# Altium PCB pcb.PcbDoc (part 4 of 6)
Units mm, origin at the board's own origin, x right, y up, seen from the top; angles counter-clockwise.
Board outline 163.6 x 137.4 mm, 4 copper layers (Top Layer, GND2, GND3, Bottom Layer), stack 1.586 mm thick; 362 components, 323 nets, 1261 pads, 657 vias.
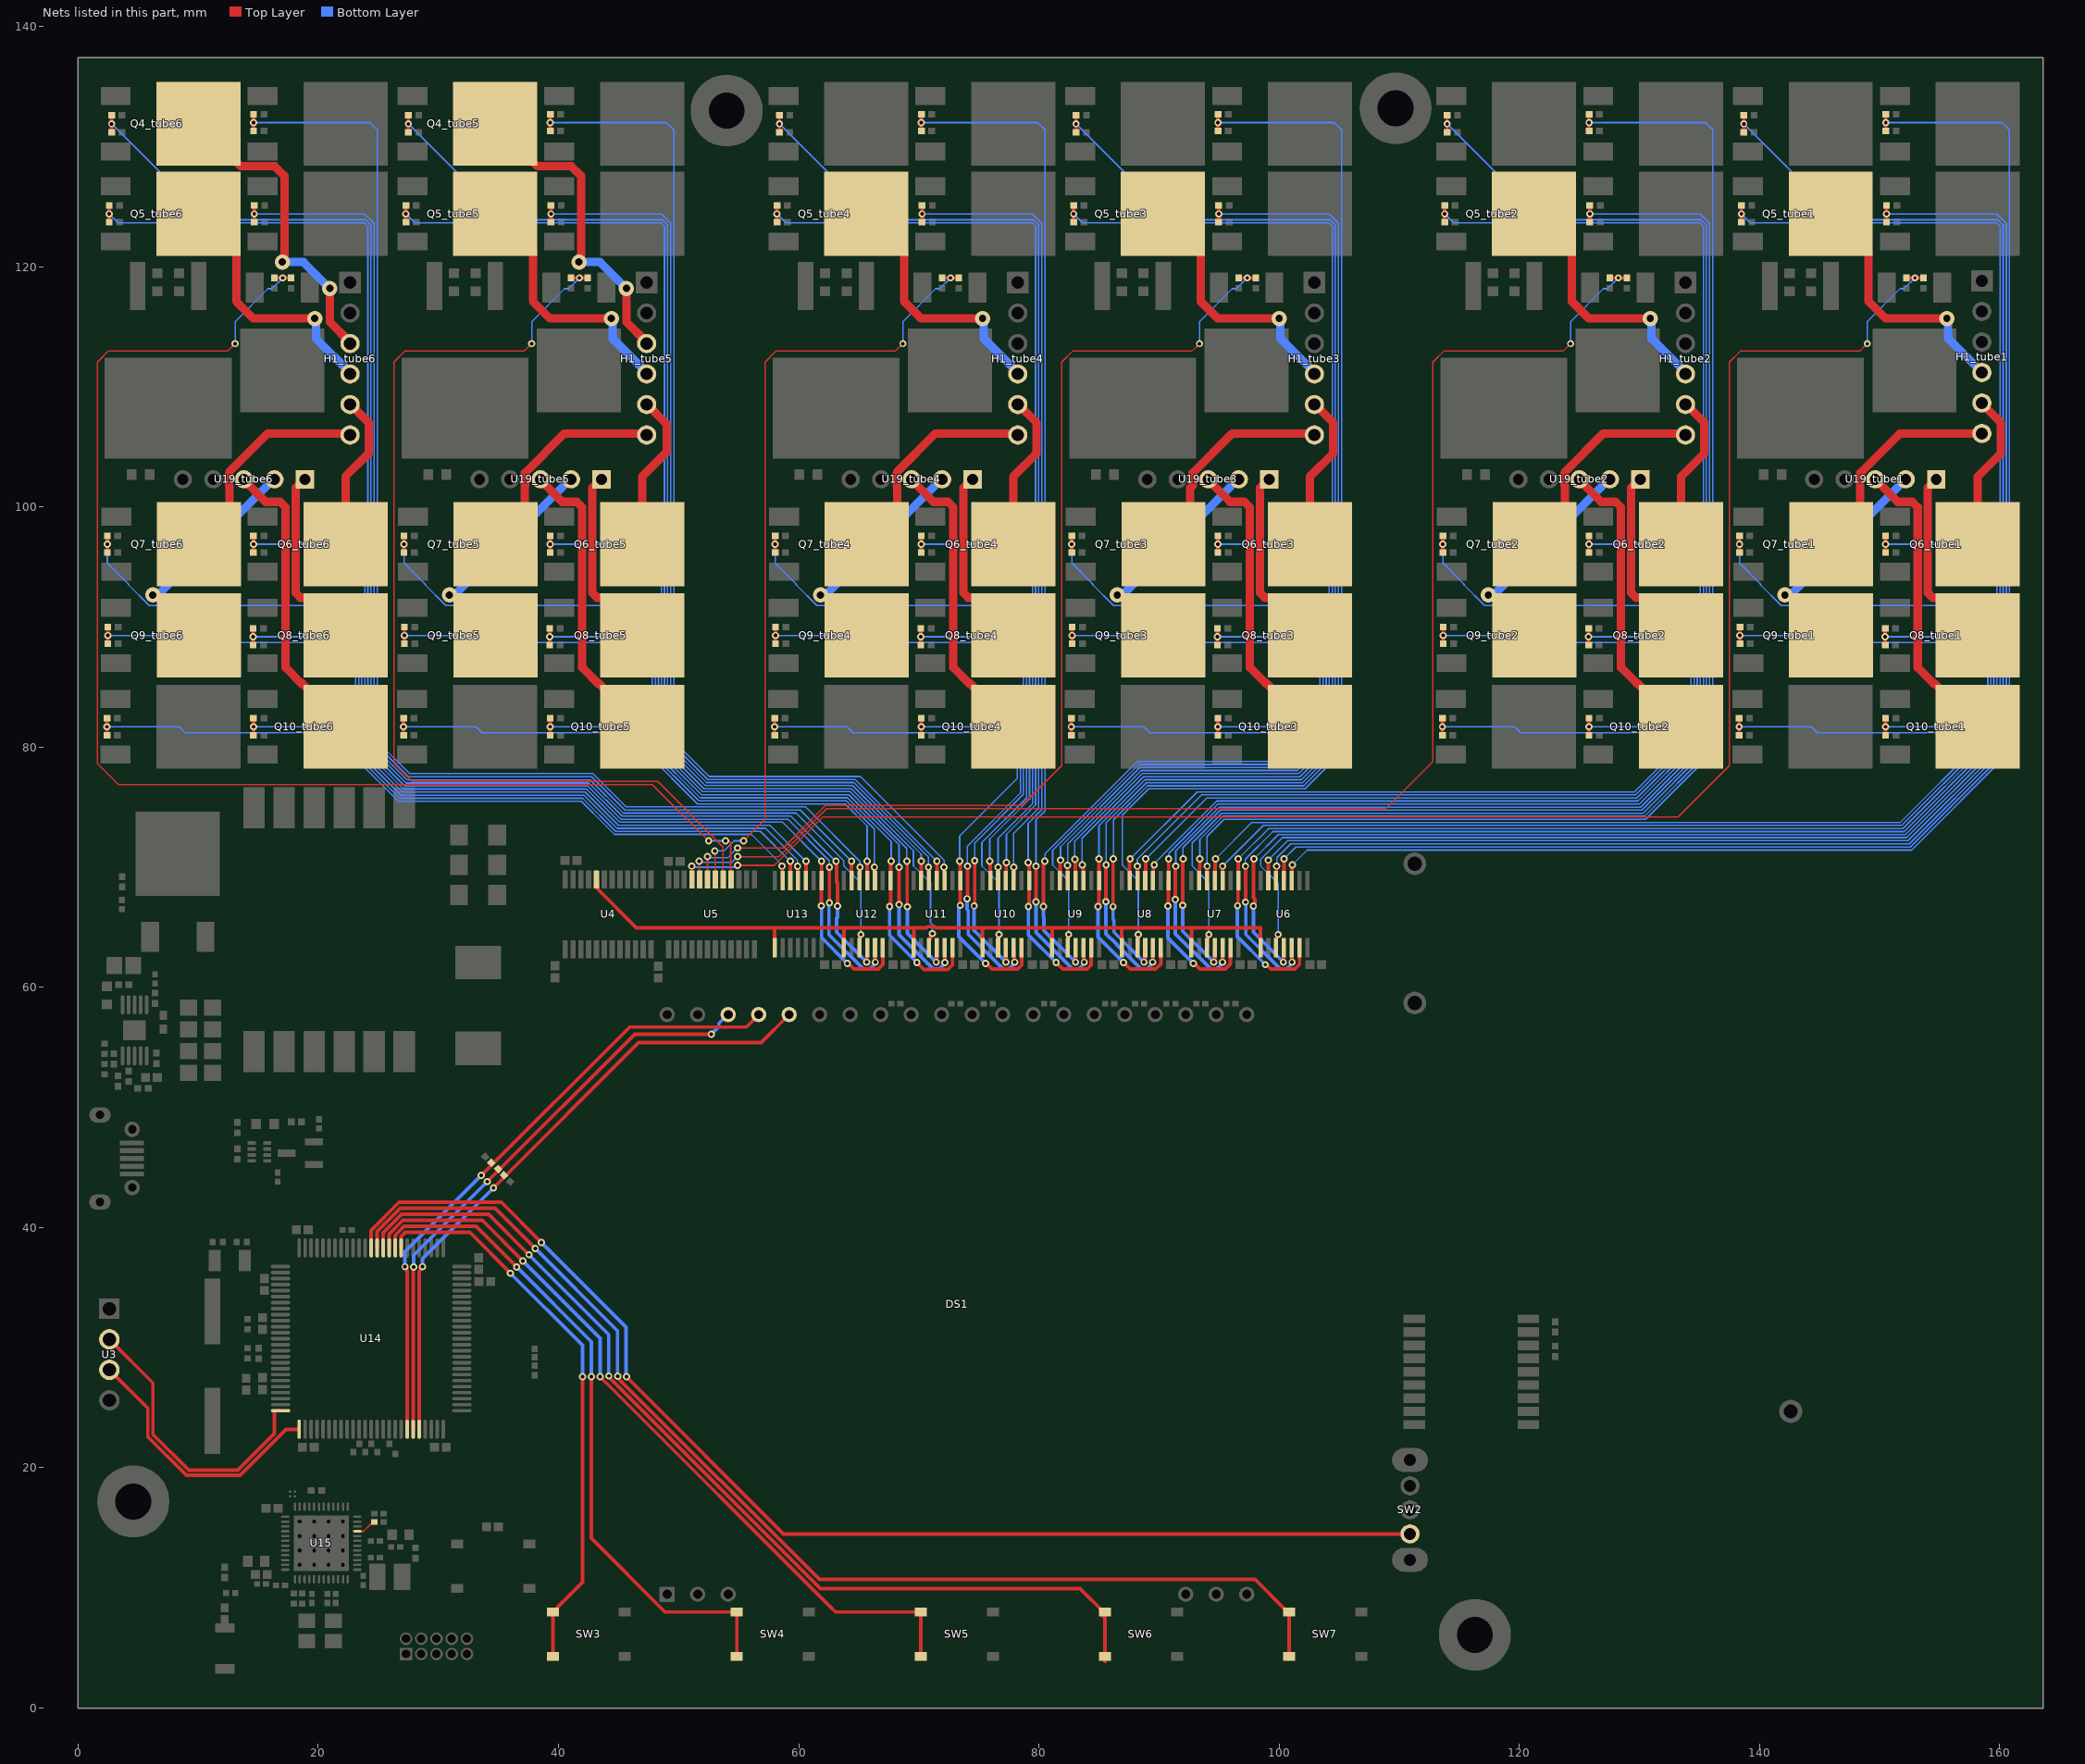
[diagram p5: the nets of this part, all layers, seen from the top]

## Via types
v1: diameter 0.6, hole 0.3, Top Layer to Bottom Layer, 545 vias
v2: diameter 1.27, hole 0.6, Top Layer to Bottom Layer, 97 vias
v3: diameter 1.27, hole 0.711, Top Layer to Bottom Layer, 13 vias
v4: diameter 0.5, hole 0.2, Top Layer to Bottom Layer, 2 vias

## Nets (pads, with @x,y where several pads share a name; then routed paths per layer and width w, separated by ;. In a path a pad name is that pad's centre, name@x,y a point inside that pad or via, vN(x,y) a via of type N, cw(c..) or ccw(c..) an arc to the next point about the centre after c; other vN are vias at no path point) (continued)
CATH_3_tube5: H1_tube5.3 Q4_tube5.4 | length 26.2
  Top Layer w0.7: Q4_tube5.4@34.725,131.9 38.248,128.377 38.618,128.377 38.622,128.373 41.071,128.373 41.885,127.559 41.885,120.988 41.809,120.912 41.809,120.509 v2(41.7,120.4) ; v2(45.657,118.2) 45.657,115.402 H1_tube5.3@47.319,113.74
  Bottom Layer w0.7: v2(41.7,120.4) 43.457,120.4 v2(45.657,118.2)
CATH_3_tube6: H1_tube6.3 Q4_tube6.4 | length 26.2
  Top Layer w0.7: Q4_tube6.4@10.025,131.9 13.548,128.377 13.918,128.377 13.922,128.373 16.371,128.373 17.185,127.559 17.185,120.988 17.109,120.912 17.109,120.509 v2(17,120.4) ; v2(20.957,118.2) 20.957,115.402 H1_tube6.3@22.619,113.74
  Bottom Layer w0.7: v2(17,120.4) 18.757,120.4 v2(20.957,118.2)
CATH_4_tube1: H1_tube1.4 Q5_tube1.4 | length 21.4
  Top Layer w0.7: Q5_tube1.4@145.925,124.4 149.075,121.25 149.075,117.125 150.5,115.7 v2(155.6,115.7)
  Bottom Layer w0.7: v2(155.6,115.7) 155.703,115.597 155.703,114.015 H1_tube1.4@158.519,111.2
CATH_4_tube2: H1_tube2.4 Q5_tube2.4 | length 21.4
  Top Layer w0.7: Q5_tube2.4@121.225,124.4 124.375,121.25 124.375,117.125 125.8,115.7 v2(130.9,115.7)
  Bottom Layer w0.7: v2(130.9,115.7) 131.003,115.597 131.003,114.015 H1_tube2.4@133.819,111.2
CATH_4_tube3: H1_tube3.4 Q5_tube3.4 | length 21.4
  Top Layer w0.7: Q5_tube3.4@90.325,124.4 93.475,121.25 93.475,117.125 94.9,115.7 v2(100,115.7)
  Bottom Layer w0.7: v2(100,115.7) 100.103,115.597 100.103,114.015 H1_tube3.4@102.919,111.2
CATH_4_tube4: H1_tube4.4 Q5_tube4.4 | length 21.4
  Top Layer w0.7: Q5_tube4.4@65.625,124.4 68.775,121.25 68.775,117.125 70.2,115.7 v2(75.3,115.7)
  Bottom Layer w0.7: v2(75.3,115.7) 75.403,115.597 75.403,114.015 H1_tube4.4@78.219,111.2
CATH_4_tube5: H1_tube5.4 Q5_tube5.4 | length 21.4
  Top Layer w0.7: Q5_tube5.4@34.725,124.4 37.875,121.25 37.875,117.125 39.3,115.7 v2(44.4,115.7)
  Bottom Layer w0.7: v2(44.4,115.7) 44.503,115.597 44.503,114.015 H1_tube5.4@47.319,111.2
CATH_4_tube6: H1_tube6.4 Q5_tube6.4 | length 21.4
  Top Layer w0.7: Q5_tube6.4@10.025,124.4 13.175,121.25 13.175,117.125 14.6,115.7 v2(19.7,115.7)
  Bottom Layer w0.7: v2(19.7,115.7) 19.803,115.597 19.803,114.015 H1_tube6.4@22.619,111.2
CATH_5_tube1: H1_tube1.5 Q6_tube1.4 | length 13.2
  Top Layer w0.7: Q6_tube1.4@158.169,96.9 158.169,102.536 160.1,104.467 160.1,107.016 158.519,108.597 H1_tube1.5@158.519,108.66
CATH_5_tube2: H1_tube2.5 Q6_tube2.4 | length 13.2
  Top Layer w0.7: Q6_tube2.4@133.469,96.9 133.469,102.536 135.4,104.467 135.4,107.016 H1_tube2.5@133.819,108.597
CATH_5_tube3: H1_tube3.5 Q6_tube3.4 | length 13.2
  Top Layer w0.7: Q6_tube3.4@102.569,96.9 102.569,102.536 104.5,104.467 104.5,107.016 H1_tube3.5@102.919,108.597
CATH_5_tube4: H1_tube4.5 Q6_tube4.4 | length 13.2
  Top Layer w0.7: Q6_tube4.4@77.869,96.9 77.869,102.536 79.8,104.467 79.8,107.016 H1_tube4.5@78.219,108.597
CATH_5_tube5: H1_tube5.5 Q6_tube5.4 | length 13.2
  Top Layer w0.7: Q6_tube5.4@46.969,96.9 46.969,102.536 49,104.567 49,106.916 H1_tube5.5@47.319,108.597
CATH_5_tube6: H1_tube6.5 Q6_tube6.4 | length 13.2
  Top Layer w0.7: Q6_tube6.4@22.269,96.9 22.269,102.536 24.2,104.467 24.2,107.016 H1_tube6.5@22.619,108.597
CATH_6_tube1: H1_tube1.6 Q7_tube1.4 | length 18.4
  Top Layer w0.7: Q7_tube1.4@145.967,96.9 148.391,99.324 148.391,102.818 151.693,106.12 H1_tube1.6@158.519,106.12
CATH_6_tube2: H1_tube2.6 Q7_tube2.4 | length 18.4
  Top Layer w0.7: Q7_tube2.4@121.267,96.9 123.8,99.433 123.8,101.756 123.764,101.791 123.764,102.818 123.8,102.853 123.8,102.926 126.993,106.12 H1_tube2.6@133.819,106.12
CATH_6_tube3: H1_tube3.6 Q7_tube3.4 | length 18.4
  Top Layer w0.7: Q7_tube3.4@90.367,96.9 92.6,99.133 92.6,101.589 92.802,101.791 92.802,102.829 96.093,106.12 H1_tube3.6@102.919,106.12
CATH_6_tube4: H1_tube4.6 Q7_tube4.4 | length 18.4
  Top Layer w0.7: Q7_tube4.4@65.667,96.9 68.2,99.433 68.2,101.756 68.164,101.791 68.164,102.818 68.2,102.853 68.2,102.926 71.393,106.12 H1_tube4.6@78.219,106.12
CATH_6_tube5: H1_tube5.6 Q7_tube5.4 | length 18.4
  Top Layer w0.7: Q7_tube5.4@34.767,96.9 37.2,99.333 37.2,101.789 37.202,101.791 37.202,102.829 40.493,106.12 H1_tube5.6@47.319,106.12
CATH_6_tube6: H1_tube6.6 Q7_tube6.4 | length 18.4
  Top Layer w0.7: Q7_tube6.4@10.067,96.9 12.6,99.433 12.6,101.756 12.564,101.791 12.564,102.818 12.6,102.853 12.6,102.926 15.793,106.12 H1_tube6.6@22.619,106.12
CATH_7_tube1: Q8_tube1.4 U19_tube1.1 | length 15.4
  Top Layer w0.7: U19_tube1.1@154.71,102.304 154,101.594 154,92.86 154.41,92.45 155.019,92.45 Q8_tube1.4@158.169,89.3
CATH_7_tube2: Q8_tube2.4 U19_tube2.1 | length 15.4
  Top Layer w0.7: U19_tube2.1@130.01,102.304 129.3,101.594 129.3,92.86 129.71,92.45 130.319,92.45 Q8_tube2.4@133.469,89.3
CATH_7_tube3: Q8_tube3.4 U19_tube3.1 | length 15.4
  Top Layer w0.7: U19_tube3.1@99.11,102.304 98.4,101.594 98.4,92.86 98.81,92.45 99.419,92.45 Q8_tube3.4@102.569,89.3
CATH_7_tube4: Q8_tube4.4 U19_tube4.1 | length 15.4
  Top Layer w0.7: U19_tube4.1@74.41,102.304 73.7,101.594 73.7,92.86 74.11,92.45 74.719,92.45 Q8_tube4.4@77.869,89.3
CATH_7_tube5: Q8_tube5.4 U19_tube5.1 | length 15.4
  Top Layer w0.7: U19_tube5.1@43.51,102.304 42.8,101.594 42.8,92.86 43.21,92.45 43.819,92.45 Q8_tube5.4@46.969,89.3
CATH_7_tube6: Q8_tube6.4 U19_tube6.1 | length 15.4
  Top Layer w0.7: U19_tube6.1@18.81,102.304 18.1,101.594 18.1,92.86 18.51,92.45 19.119,92.45 Q8_tube6.4@22.269,89.3
CATH_8_tube1: Q9_tube1.4 U19_tube1.2 | length 14.1
  Bottom Layer w0.7: v2(142.112,92.665) 142.221,92.774 142.64,92.774 U19_tube1.2@152.17,102.304
CATH_8_tube2: Q9_tube2.4 U19_tube2.2 | length 14.1
  Bottom Layer w0.7: v2(117.412,92.665) 117.521,92.774 117.94,92.774 U19_tube2.2@127.47,102.304
CATH_8_tube3: Q9_tube3.4 U19_tube3.2 | length 14.1
  Bottom Layer w0.7: v2(86.512,92.665) 86.621,92.774 87.04,92.774 U19_tube3.2@96.57,102.304
CATH_8_tube4: Q9_tube4.4 U19_tube4.2 | length 14.1
  Bottom Layer w0.7: v2(61.812,92.665) 61.921,92.774 62.34,92.774 U19_tube4.2@71.87,102.304
CATH_8_tube5: Q9_tube5.4 U19_tube5.2 | length 14.1
  Bottom Layer w0.7: v2(30.912,92.665) 31.021,92.774 31.44,92.774 U19_tube5.2@40.97,102.304
CATH_8_tube6: Q9_tube6.4 U19_tube6.2 | length 14.1
  Bottom Layer w0.7: v2(6.212,92.665) 6.321,92.774 6.74,92.774 U19_tube6.2@16.27,102.304
CATH_9_tube1: Q10_tube1.4 U19_tube1.3 | length 24.9
  Top Layer w0.7: U19_tube1.3@149.63,102.304 151.508,100.427 152.717,100.427 153.173,99.971 153.173,86.622 154.472,85.323 154.547,85.323 Q10_tube1.4@158.169,81.7
CATH_9_tube2: Q10_tube2.4 U19_tube2.3 | length 24.9
  Top Layer w0.7: U19_tube2.3@124.93,102.304 126.808,100.427 128.017,100.427 128.473,99.971 128.473,86.622 129.772,85.323 129.847,85.323 Q10_tube2.4@133.469,81.7
CATH_9_tube3: Q10_tube3.4 U19_tube3.3 | length 24.9
  Top Layer w0.7: U19_tube3.3@94.03,102.304 95.908,100.427 97.117,100.427 97.573,99.971 97.573,86.622 98.872,85.323 98.947,85.323 Q10_tube3.4@102.569,81.7
CATH_9_tube4: Q10_tube4.4 U19_tube4.3 | length 24.9
  Top Layer w0.7: U19_tube4.3@69.33,102.304 71.208,100.427 72.417,100.427 72.873,99.971 72.873,86.622 74.172,85.323 74.247,85.323 Q10_tube4.4@77.869,81.7
CATH_9_tube5: Q10_tube5.4 U19_tube5.3 | length 24.9
  Top Layer w0.7: U19_tube5.3@38.43,102.304 40.308,100.427 41.517,100.427 41.973,99.971 41.973,86.622 43.272,85.323 43.347,85.323 Q10_tube5.4@46.969,81.7
CATH_9_tube6: Q10_tube6.4 U19_tube6.3 | length 24.9
  Top Layer w0.7: U19_tube6.3@13.73,102.304 15.608,100.427 16.817,100.427 17.273,99.971 17.273,86.622 18.572,85.323 18.647,85.323 Q10_tube6.4@22.269,81.7
CLK_5V: U4.20 U6.8 U7.8 U8.8 U9.8 U10.8 U11.8 U12.8 U13.8 | length 70.9
  Top Layer w0.3: U4.20@43.16,68.981 43.235,68.906 43.235,68.218 46.476,64.977 58,64.977 ; U13.8@58,63.3 58,64.977 ; U12.8@63.75,63.3 63.775,63.325 63.775,64.977 ; U11.8@69.55,63.3 69.575,63.325 69.575,64.977 ; U10.8@75.3,63.3 75.3,64.977 ; U9.8@81.1,63.3 81.1,64.977 ; U8.8@86.9,63.3 86.9,64.95 86.927,64.977 ; U7.8@92.7,63.3 92.7,64.977 ; U6.8@98.45,63.3 98.45,64.977 92.7,64.977 ; 58,64.977 63.775,64.977 ; 63.775,64.977 69.575,64.977 ; 69.575,64.977 70.011,64.977 70.65,64.977 70.729,65.056 71.367,65.056 71.447,64.977 75.3,64.977 ; 75.3,64.977 81.1,64.977 ; 81.1,64.977 86.927,64.977 ; 86.927,64.977 92.7,64.977
CONFIG_BUTTON_1: SW3.1 SW3.3 U14.83 | length 47.1
  Top Layer w0.3: U14.83@26.9,38.31 26.9,39.26 27.24,39.6 32.616,39.6 36,36.216 v1(36,36.2) ; SW3.3@39.523,4.3 SW3.1@39.523,8 39.648,8 39.873,8.225 39.873,8.35 42,10.477 v1(42,27.6)
  Bottom Layer w0.3: v1(36,36.2) 42,30.2 v1(42,27.6)
CONFIG_BUTTON_2: SW4.1 SW4.3 U14.84 | length 56.4
  Top Layer w0.3: U14.84@26.399,38.31 26.399,39.364 27.136,40.1 33.128,40.1 v1(36.514,36.714) ; v1(42.727,27.6) 42.727,14.132 48.86,8 SW4.1@54.848,8 SW4.3@54.848,4.3
  Bottom Layer w0.3: v1(36.514,36.714) 42.727,30.501 v1(42.727,27.6)
CONFIG_BUTTON_3: SW5.1 SW5.3 U14.85 | length 65
  Top Layer w0.3: U14.85@25.9,38.31 25.9,39.468 27.032,40.6 33.656,40.6 v1(37.028,37.228) ; v1(43.454,27.6) 43.454,27.557 43.943,27.068 43.987,27.068 62.581,8.473 63.054,8 SW5.1@70.174,8 SW5.3@70.174,4.3
  Bottom Layer w0.3: v1(37.028,37.228) 43.454,30.802 v1(43.454,27.6)
CONFIG_BUTTON_4: SW6.1 SW6.3 U14.86 | length 81.6
  Top Layer w0.3: U14.86@25.399,38.31 25.399,39.571 26.928,41.1 34.184,41.1 v1(37.542,37.742) ; v1(44.182,27.645) 44.182,27.563 61.799,9.947 83.428,9.947 85.375,8 SW6.1@85.5,8 ; 85.375,7.6 85.5,7.6 85.5,3.9
  Bottom Layer w0.3: v1(37.542,37.742) 44.181,31.103 44.181,27.646 v1(44.182,27.645)
CONFIG_BUTTON_5: SW7.1 SW7.3 U14.87 | length 97.9
  Top Layer w0.3: U14.87@24.9,38.31 24.9,39.675 26.824,41.6 34.713,41.6 v1(38.056,38.256) ; v1(44.935,27.627) 44.935,27.546 45.084,27.396 45.084,27.335 61.719,10.7 98,10.7 100.476,8.225 SW7.1@100.701,8 ; SW7.3@100.826,4.3 SW7.1@100.826,8
  Bottom Layer w0.3: v1(38.056,38.256) 44.908,31.405 44.908,27.654 v1(44.935,27.627)
CONFIG_ENABLE: SW2.1 U14.88 | length 102.8
  Top Layer w0.3: U14.88@24.399,38.31 24.399,39.779 26.72,42.1 35.241,42.1 v1(38.57,38.77) ; v1(45.661,27.599) 45.661,27.574 58.735,14.5 SW2.1@110.9,14.5
  Bottom Layer w0.3: v1(38.57,38.77) 45.635,31.706 45.635,27.625 v1(45.661,27.599)
DEBUG_UART_RX: U3.3 U14.26 | length 22.4
  Top Layer w0.3: U3.3@2.6,28.16 5.803,24.957 5.803,23.644 5.803,22.593 9.023,19.373 13.477,19.373 17.314,23.21 U14.26@18.399,23.21
DEBUG_UART_TX: U3.2 U14.25 | length 24.5
  Top Layer w0.3: U3.2@2.6,30.7 6.23,27.07 6.23,22.77 9.2,19.8 13.3,19.8 16.349,22.85 16.349,24.76 U14.25@16.849,24.76
DIG_0_tube1: R29_tube1.1 R31_tube1.1 U7.4 | length 91.9
  Top Layer w0.3: U7.4@94.65,68.9 94.675,68.925 94.675,70.675 v1(94.7,70.7) ; R29_tube1.1@138.3,81 v1(138.3,81.7) R31_tube1.1@138.3,82.4
  Bottom Layer w0.127: v1(94.7,70.7) 97.741,73.741 151.734,73.741 158.5,80.506 158.5,80.8 158.091,81.209 144.811,81.209 144.32,81.7 v1(138.3,81.7)
DIG_0_tube2: R29_tube2.1 R31_tube2.1 U8.6 | length 74.3
  Top Layer w0.3: U8.6@87.55,68.9 87.55,70.65 v1(87.6,70.7) ; R29_tube2.1@113.6,81 v1(113.6,81.7) R31_tube2.1@113.6,82.4
  Bottom Layer w0.127: v1(87.6,70.7) 93.181,76.281 129.574,76.281 133.8,80.506 133.8,80.8 133.391,81.209 120.111,81.209 119.62,81.7 v1(113.6,81.7)
DIG_0_tube3: R29_tube3.1 R31_tube3.1 U9.11 | length 59.9
  Top Layer w0.3: v1(80.365,66.726) 80.365,70.283 80.5,70.419 v1(80.5,70.5) ; R29_tube3.1@82.7,81 v1(82.7,81.7) R31_tube3.1@82.7,82.4 ; v1(83.05,62.1) U9.11@83.05,63.3
  Bottom Layer w0.127: v1(80.5,70.5) 80.5,71.121 88.2,78.821 101.214,78.821 102.9,80.506 102.9,80.8 102.491,81.209 89.211,81.209 88.72,81.7 v1(82.7,81.7)
  Bottom Layer w0.3: v1(80.365,66.726) 80.365,65.884 80.422,65.826 80.422,64.728 v1(83.05,62.1)
DIG_0_tube4: R29_tube4.1 R31_tube4.1 U10.13 U11.1 | length 48.6
  Top Layer w0.3: R29_tube4.1@58,81 v1(58,81.7) R31_tube4.1@58,82.4 ; v1(73.4,70.5) 73.425,70.475 73.425,68.925 U11.1@73.45,68.9 73.45,67.635 73.432,67.617 73.432,66.849 v1(73.454,66.827) ; v1(75.55,62) 75.631,62 76.108,61.523 78.216,61.523 78.554,61.861 78.554,63.296 U10.13@78.55,63.3
  Bottom Layer w0.127: v1(58,81.7) 64.02,81.7 64.511,81.209 77.791,81.209 78.2,80.8 78.2,77.4 73.4,72.6 v1(73.4,70.5)
  Bottom Layer w0.3: v1(73.454,66.827) 73.396,66.77 73.396,66.688 73.33,66.622 73.33,64.22 v1(75.55,62)
DIG_0_tube5: R29_tube5.1 R31_tube5.1 U12.4 | length 48.7
  Top Layer w0.3: R29_tube5.1@27.1,81 v1(27.1,81.7) R31_tube5.1@27.1,82.4 ; U12.4@65.7,68.9 v1(65.7,70.5)
  Bottom Layer w0.127: v1(27.1,81.7) 33.12,81.7 33.611,81.209 46.891,81.209 47.3,80.8 47.3,79.563 51.582,75.28 63.858,75.28 65.7,73.439 v1(65.7,70.5)
DIG_0_tube6: R29_tube6.1 R31_tube6.1 U13.6 | length 64.4
  Top Layer w0.3: R29_tube6.1@2.4,81 v1(2.4,81.7) R31_tube6.1@2.4,82.4 ; v1(58.6,70.1) 58.625,70.075 58.625,68.925 U13.6@58.65,68.9
  Bottom Layer w0.127: v1(2.4,81.7) 8.42,81.7 8.911,81.209 22.191,81.209 22.6,80.8 22.6,79.563 26.663,75.5 41.9,75.5 44,73.4 44.66,72.74 56.06,72.74 56.1,72.7 58.6,70.2 v1(58.6,70.1)
DIG_1_tube1: R11_tube1.1 R12_tube1.1 U6.3 | length 128.7
  Top Layer w0.3: U6.3@101.05,68.9 101.075,68.925 101.075,70.175 v1(101.1,70.2) ; R11_tube1.1@150.512,131.3 v1(150.512,132) R12_tube1.1@150.512,132.7
  Bottom Layer w0.127: v1(101.1,70.2) 102.341,71.441 152.667,71.441 160.8,79.573 160.8,131.4 160.2,132 v1(150.512,132)
DIG_1_tube2: R11_tube2.1 R12_tube2.1 U7.5 | length 112.4
  Top Layer w0.3: U7.5@94,68.9 v1(94,70.1) ; R11_tube2.1@125.812,131.3 v1(125.812,132) R12_tube2.1@125.812,132.7
  Bottom Layer w0.127: v1(94,70.1) 94,72.563 95.431,73.995 130.521,73.995 136.1,79.573 136.1,131.4 135.5,132 v1(125.812,132)
DIG_1_tube3: R11_tube3.1 R12_tube3.1 U8.10 | length 95.8
  Top Layer w0.3: U8.10@88.2,63.3 88.225,63.325 88.225,64.348 v1(88.277,64.4) ; R11_tube3.1@94.912,131.3 v1(94.912,132) R12_tube3.1@94.912,132.7
  Bottom Layer w0.127: v1(88.277,64.4) 88.277,68.873 86.95,70.2 86.95,74.338 89.147,76.535 102.161,76.535 105.2,79.573 105.2,131.4 104.6,132 v1(94.912,132)
DIG_1_tube4: R11_tube4.1 R12_tube4.1 U9.12 | length 85.9
  Top Layer w0.3: R11_tube4.1@70.212,131.3 v1(70.212,132) R12_tube4.1@70.212,132.7 ; v1(79.76,67.13) v1(79.76,70.1) ; U9.12@83.7,63.3 83.725,63.275 83.725,62.152 v1(83.777,62.1)
  Bottom Layer w0.127: v1(70.212,132) 79.9,132 80.5,131.4 80.5,74.7 79.76,73.96 v1(79.76,70.1)
  Bottom Layer w0.3: v1(79.76,67.13) 79.76,64.574 82.811,61.523 83.289,61.523 83.627,61.861 83.627,61.869 83.777,62.019 v1(83.777,62.1)
DIG_1_tube5: R11_tube5.1 R12_tube5.1 U11.3 | length 91.2
  Top Layer w0.3: R11_tube5.1@39.312,131.3 v1(39.312,132) R12_tube5.1@39.312,132.7 ; v1(72.1,70) 72.125,69.975 72.125,68.925 U11.3@72.15,68.9
  Bottom Layer w0.127: v1(39.312,132) 49,132 49.6,131.4 49.6,80.496 52.529,77.566 65.127,77.566 72.1,70.594 v1(72.1,70)
DIG_1_tube6: R11_tube6.1 R12_tube6.1 U12.5 | length 108.8
  Top Layer w0.3: R11_tube6.1@14.612,131.3 v1(14.612,132) R12_tube6.1@14.612,132.7 ; U12.5@65.05,68.9 65.075,68.925 65.075,69.975 v1(65.1,70)
  Bottom Layer w0.127: v1(14.612,132) 24.3,132 24.9,131.4 24.9,80.496 27.596,77.8 42.853,77.8 45.626,75.026 60.567,75.026 65.1,70.494 v1(65.1,70)
DIG_2_tube1: R13_tube1.1 R14_tube1.1 U6.4 | length 121.3
  Top Layer w0.3: U6.4@100.4,68.9 v1(100.4,70.7) ; R13_tube1.1@150.567,123.7 v1(150.567,124.4) R14_tube1.1@150.567,125.1
  Bottom Layer w0.127: v1(100.4,70.7) 101.395,71.695 152.562,71.695 160.532,79.664 160.532,80.434 160.546,80.448 160.546,123.613 159.759,124.4 v1(150.567,124.4)
DIG_2_tube2: R13_tube2.1 R14_tube2.1 U7.6 | length 104.6
  Top Layer w0.3: v1(93.4,70.7) 93.4,69.95 93.375,69.925 U7.6@93.375,68.925 ; R13_tube2.1@125.867,123.7 v1(125.867,124.4) R14_tube2.1@125.867,125.1 ; U7.6@93.375,68.925 U7.6@93.35,68.9 U7.6@93.375,68.925
  Bottom Layer w0.127: v1(93.4,70.7) 93.4,72.322 95.326,74.249 130.416,74.249 135.832,79.664 135.832,80.434 135.846,80.448 135.846,123.613 135.059,124.4 v1(125.867,124.4)
DIG_2_tube3: R13_tube3.1 R14_tube3.1 U8.11 | length 90.9
  Top Layer w0.3: v1(86.172,66.72) 86.172,70.672 v1(86.2,70.7) ; v1(88.75,62.1) 88.75,62.181 88.825,62.256 88.825,63.275 U8.11@88.85,63.3 ; R13_tube3.1@94.967,123.7 v1(94.967,124.4) R14_tube3.1@94.967,125.1
  Bottom Layer w0.127: v1(86.2,70.7) 86.2,73.947 89.042,76.789 102.056,76.789 104.932,79.664 104.932,80.434 104.946,80.448 104.946,123.613 104.159,124.4 v1(94.967,124.4)
  Bottom Layer w0.3: v1(86.172,66.72) 86.172,65.658 86.25,65.58 86.25,64.6 v1(88.75,62.1)
DIG_2_tube4: R13_tube4.1 R14_tube4.1 U9.13 U10.1 | length 79.5
  Top Layer w0.3: R13_tube4.1@70.267,123.7 v1(70.267,124.4) R14_tube4.1@70.267,125.1 ; v1(79.1,70.404) 79.1,70.322 79.183,70.239 79.183,68.917 U10.1@79.2,68.9 79.175,68.875 79.175,66.785 v1(79.118,66.729) ; v1(81.437,62.081) 81.995,61.523 84.016,61.523 84.354,61.861 84.354,63.296 U9.13@84.35,63.3
  Bottom Layer w0.127: v1(70.267,124.4) 79.459,124.4 80.246,123.613 80.246,74.805 79.1,73.659 v1(79.1,70.404)
  Bottom Layer w0.3: v1(79.118,66.729) 79.118,64.4 v1(81.437,62.081)
DIG_2_tube5: R13_tube5.1 R14_tube5.1 U11.4 | length 82.8
  Top Layer w0.3: R13_tube5.1@39.367,123.7 v1(39.367,124.4) R14_tube5.1@39.367,125.1 ; U11.4@71.5,68.9 v1(71.5,70.5)
  Bottom Layer w0.127: v1(39.367,124.4) 48.559,124.4 49.346,123.613 49.346,80.39 52.424,77.312 64.7,77.312 71.5,70.512 v1(71.5,70.5)
DIG_2_tube6: R13_tube6.1 R14_tube6.1 U12.6 | length 100.4
  Top Layer w0.3: R13_tube6.1@14.667,123.7 v1(14.667,124.4) R14_tube6.1@14.667,125.1 ; U12.6@64.4,68.9 v1(64.4,70.5)
  Bottom Layer w0.127: v1(14.667,124.4) 23.859,124.4 24.646,123.613 24.646,80.39 27.49,77.546 42.747,77.546 45.521,74.772 60.128,74.772 v1(64.4,70.5)
DIG_3_tube1: R15_tube1.1 R16_tube1.1 U6.5 | length 136.3
  Top Layer w0.3: U6.5@99.75,68.9 99.775,68.925 99.775,70.075 v1(99.8,70.1) ; R15_tube1.1@138.692,131.2 v1(138.692,131.9) R16_tube1.1@138.692,132.6
  Bottom Layer w0.127: v1(99.8,70.1) 99.8,70.794 100.969,71.963 152.471,71.963 160.278,79.77 160.278,123.481 159.85,123.909 146.683,123.909 v1(138.692,131.9)
DIG_3_tube2: R15_tube2.1 R16_tube2.1 U7.10 | length 125.6
  Top Layer w0.3: U7.10@94,63.3 94.025,63.325 94.025,64.194 94.15,64.319 v1(94.15,64.4) ; R15_tube2.1@113.992,131.2 v1(113.992,131.9) R16_tube2.1@113.992,132.6
  Bottom Layer w0.127: v1(94.15,64.4) 94.15,68.727 92.75,70.127 92.75,72.032 95.221,74.503 130.311,74.503 135.578,79.77 135.578,123.481 135.15,123.909 121.983,123.909 v1(113.992,131.9)
DIG_3_tube3: R15_tube3.1 R16_tube3.1 U8.12 | length 107.6
  Top Layer w0.3: R15_tube3.1@83.092,131.2 v1(83.092,131.9) R16_tube3.1@83.092,132.6 ; v1(85.577,67.137) 85.577,70.182 v1(85.595,70.2) ; v1(89.477,62.1) 89.489,62.112 89.489,63.288 U8.12@89.5,63.3
  Bottom Layer w0.127: v1(83.092,131.9) 91.083,123.909 104.25,123.909 104.678,123.481 104.678,79.77 101.951,77.043 88.936,77.043 85.595,73.701 v1(85.595,70.2)
  Bottom Layer w0.3: v1(85.577,67.137) 85.577,64.473 86.45,63.6 86.45,63.584 88.511,61.523 88.989,61.523 89.327,61.861 89.327,61.869 89.477,62.019 v1(89.477,62.1)
DIG_3_tube4: R15_tube4.1 R16_tube4.1 U10.3 | length 81.9
  Top Layer w0.3: R15_tube4.1@58.392,131.2 v1(58.392,131.9) R16_tube4.1@58.392,132.6 ; U10.3@77.9,68.9 v1(77.9,70)
  Bottom Layer w0.127: v1(58.392,131.9) 66.383,123.909 79.55,123.909 79.978,123.481 79.978,74.896 77.9,72.818 v1(77.9,70)
DIG_3_tube5: R15_tube5.1 R16_tube5.1 U11.5 | length 97.3
  Top Layer w0.3: R15_tube5.1@27.492,131.2 v1(27.492,131.9) R16_tube5.1@27.492,132.6 ; v1(70.8,70) 70.825,69.975 70.825,68.925 U11.5@70.85,68.9
  Bottom Layer w0.127: v1(27.492,131.9) 35.483,123.909 48.65,123.909 49.078,123.481 49.078,80.299 52.319,77.058 64.595,77.058 70.8,70.853 v1(70.8,70)
DIG_3_tube6: R15_tube6.1 R16_tube6.1 U12.10 | length 121
  Top Layer w0.3: R15_tube6.1@2.792,131.2 v1(2.792,131.9) R16_tube6.1@2.792,132.6 ; U12.10@65.05,63.3 65.075,63.325 65.075,64.217 65.177,64.319 v1(65.177,64.4)
  Bottom Layer w0.127: v1(2.792,131.9) 10.783,123.909 23.95,123.909 24.378,123.481 24.378,80.299 27.399,77.278 42.636,77.278 45.396,74.518 59.775,74.518 63.75,70.544 63.75,70.127 65.177,68.7 v1(65.177,64.4)
DIG_4_tube1: R17_tube1.1 R18_tube1.1 U6.6 | length 133.3
  Top Layer w0.3: U6.6@99.1,68.9 v1(99.1,70.6) ; R17_tube1.1@138.492,123.7 v1(138.492,124.4) R18_tube1.1@138.492,125.1
  Bottom Layer w0.127: v1(99.1,70.6) 100.717,72.217 152.366,72.217 160.024,79.875 160.024,123.376 159.745,123.655 139.237,123.655 v1(138.492,124.4)
DIG_4_tube2: R17_tube2.1 R18_tube2.1 U7.11 | length 125.5
  Top Layer w0.3: v1(91.965,66.827) 91.965,70.665 v1(92,70.7) ; v1(94.55,62.1) 94.55,62.181 94.625,62.256 94.625,63.275 U7.11@94.65,63.3 ; R17_tube2.1@113.792,123.7 v1(113.792,124.4) R18_tube2.1@113.792,125.1
  Bottom Layer w0.127: v1(92,70.7) 92,71.641 95.116,74.757 130.206,74.757 135.324,79.875 135.324,123.376 135.045,123.655 114.537,123.655 v1(113.792,124.4)
  Bottom Layer w0.3: v1(91.965,66.827) 91.965,64.685 92.05,64.6 v1(94.55,62.1)
DIG_4_tube3: R17_tube3.1 R18_tube3.1 U8.13 U9.1 | length 106.1
  Top Layer w0.3: R17_tube3.1@82.892,123.7 v1(82.892,124.4) R18_tube3.1@82.892,125.1 ; v1(84.923,66.734) 84.923,66.815 85,66.892 U9.1@85,68.9 v1(85,70.7) ; v1(87.05,62.073) 87.6,61.523 89.716,61.523 90.15,61.957 U8.13@90.15,63.3
  Bottom Layer w0.127: v1(82.892,124.4) 83.637,123.655 104.145,123.655 104.424,123.376 104.424,79.875 101.846,77.297 88.831,77.297 85,73.465 v1(85,70.7)
  Bottom Layer w0.3: v1(84.923,66.734) 84.923,64.2 v1(87.05,62.073)
DIG_4_tube4: R17_tube4.1 R18_tube4.1 U10.4 | length 78.9
  Top Layer w0.3: R17_tube4.1@58.192,123.7 v1(58.192,124.4) R18_tube4.1@58.192,125.1 ; U10.4@77.25,68.9 77.273,68.923 77.273,70.381 v1(77.295,70.403)
  Bottom Layer w0.127: v1(58.192,124.4) 58.937,123.655 79.445,123.655 79.724,123.376 79.724,75.18 77.295,72.751 v1(77.295,70.403)
DIG_4_tube5: R17_tube5.1 R18_tube5.1 U11.6 | length 93.9
  Top Layer w0.3: R17_tube5.1@27.292,123.7 v1(27.292,124.4) R18_tube5.1@27.292,125.1 ; U11.6@70.2,68.9 v1(70.2,70.5)
  Bottom Layer w0.127: v1(27.292,124.4) 28.037,123.655 48.545,123.655 48.824,123.376 48.824,80.194 52.214,76.804 64.49,76.804 70.2,71.094 v1(70.2,70.5)
DIG_4_tube6: R17_tube6.1 R18_tube6.1 U12.11 | length 120.3
  Top Layer w0.3: R17_tube6.1@2.592,123.7 v1(2.592,124.4) R18_tube6.1@2.592,125.1 ; v1(63.1,70.5) 63.15,70.45 63.15,68.775 63.23,68.695 v1(63.23,66.77) ; v1(65.65,62.1) 65.675,62.125 65.675,63.275 U12.11@65.7,63.3
  Bottom Layer w0.127: v1(2.592,124.4) 3.337,123.655 23.845,123.655 24.124,123.376 24.124,80.194 27.294,77.024 42.531,77.024 45.291,74.264 59.336,74.264 v1(63.1,70.5)
  Bottom Layer w0.3: v1(63.23,66.77) 63.23,65.845 63.15,65.765 63.15,64.6 v1(65.65,62.1)
DIG_5_tube1: R19_tube1.1 R20_tube1.1 U6.10 | length 99.5
  Top Layer w0.3: U6.10@99.75,63.3 99.775,63.325 99.775,64.173 99.921,64.319 v1(99.921,64.4) ; R19_tube1.1@150.5,96.2 v1(150.5,96.9) R20_tube1.1@150.5,97.6
  Bottom Layer w0.127: v1(99.921,64.4) 99.921,68.656 98.45,70.127 98.45,70.644 100.277,72.471 152.26,72.471 159.77,79.98 159.77,94.73 157.6,96.9 v1(150.5,96.9)
DIG_5_tube2: R19_tube2.1 R20_tube2.1 U7.12 | length 87.1
  Top Layer w0.3: v1(91.365,67.327) 91.365,70.077 v1(91.388,70.1) ; v1(95.277,62.1) 95.289,62.112 95.289,63.288 U7.12@95.3,63.3 ; R19_tube2.1@125.8,96.2 v1(125.8,96.9) R20_tube2.1@125.8,97.6
  Bottom Layer w0.127: v1(91.388,70.1) 91.388,71.388 95.01,75.011 130.1,75.011 135.07,79.98 135.07,94.73 132.9,96.9 v1(125.8,96.9)
  Bottom Layer w0.3: v1(91.365,67.327) 91.365,64.469 94.311,61.523 94.789,61.523 95.127,61.861 95.127,61.869 95.277,62.019 v1(95.277,62.1)
DIG_5_tube3: R19_tube3.1 R20_tube3.1 U9.3 | length 53.6
  Top Layer w0.3: v1(83.602,70.2) 83.602,70.119 83.675,70.046 83.675,68.925 U9.3@83.7,68.9 ; R19_tube3.1@94.9,96.2 v1(94.9,96.9) R20_tube3.1@94.9,97.6
  Bottom Layer w0.127: v1(83.602,70.2) 83.602,72.426 88.726,77.551 101.74,77.551 104.17,79.98 104.17,94.73 102,96.9 v1(94.9,96.9)
DIG_5_tube4: R19_tube4.1 R20_tube4.1 U10.5 | length 38.6
  Top Layer w0.3: R19_tube4.1@70.2,96.2 v1(70.2,96.9) R20_tube4.1@70.2,97.6 ; U10.5@76.6,68.9 v1(76.6,70)
  Bottom Layer w0.127: v1(70.2,96.9) 77.3,96.9 79.47,94.73 79.47,75.285 76.6,72.415 v1(76.6,70)
DIG_5_tube5: R19_tube5.1 R20_tube5.1 U11.10 | length 59.6
  Top Layer w0.3: R19_tube5.1@39.3,96.2 v1(39.3,96.9) R20_tube5.1@39.3,97.6 ; U11.10@70.85,63.3 70.875,63.325 70.875,63.95 70.98,64.055 70.98,64.249 71.128,64.398 v1(71.128,64.479)
  Bottom Layer w0.127: v1(39.3,96.9) 46.4,96.9 48.57,94.73 48.57,80.089 52.108,76.55 64.384,76.55 69.55,71.385 69.55,70.127 70.977,68.7 70.977,65.379 71.127,65.229 71.127,64.481 v1(71.128,64.479)
DIG_5_tube6: R19_tube6.1 R20_tube6.1 U12.12 | length 81.6
  Top Layer w0.3: R19_tube6.1@14.6,96.2 v1(14.6,96.9) R20_tube6.1@14.6,97.6 ; v1@62.557,67.049 v1(62.557,70.017) ; U12.12@66.35,63.3 66.363,63.286 66.363,62.113 v1(66.377,62.1)
  Bottom Layer w0.127: v1(14.6,96.9) 21.7,96.9 23.87,94.73 23.87,80.089 27.189,76.77 42.426,76.77 45.186,74.01 59.083,74.01 62.557,70.537 v1(62.557,70.017)
  Bottom Layer w0.3: v1(62.558,67.048) 62.513,67.003 62.513,64.395 65.385,61.523 65.889,61.523 66.227,61.861 66.227,61.869 66.377,62.019 v1(66.377,62.1)
DIG_6_tube1: R21_tube1.1 R22_tube1.1 U6.11 | length 112
  Top Layer w0.3: v1(97.855,66.784) 97.855,66.865 97.991,67.001 97.991,67.358 97.873,67.476 97.873,70.673 v1(97.9,70.7) ; v1(100.35,62.1) 100.375,62.125 100.375,63.275 U6.11@100.4,63.3 ; R21_tube1.1@138.334,96.2 v1(138.334,96.9) R22_tube1.1@138.334,97.6
  Bottom Layer w0.127: v1(97.9,70.7) 99.925,72.725 152.155,72.725 159.516,80.085 159.516,88.584 156.3,91.8 141.81,91.8 140.097,93.512 140.097,93.57 138.334,95.333 v1(138.334,96.9)
  Bottom Layer w0.3: v1(97.855,66.784) 97.855,64.595 v1(100.35,62.1)
DIG_6_tube2: R21_tube2.1 R22_tube2.1 U7.13 U8.1 | length 98.1
  Top Layer w0.3: v1(90.735,66.768) 90.775,66.808 90.775,68.875 U8.1@90.8,68.9 v1(90.8,70.7) ; v1(92.85,62) 92.931,62 93.408,61.523 95.516,61.523 95.95,61.957 U7.13@95.95,63.3 ; R21_tube2.1@113.634,96.2 v1(113.634,96.9) R22_tube2.1@113.634,97.6
  Bottom Layer w0.127: v1(90.8,70.7) 90.831,70.731 90.831,71.191 94.905,75.265 129.995,75.265 134.816,80.085 134.816,88.584 131.6,91.8 117.11,91.8 115.397,93.512 115.397,93.57 113.634,95.333 v1(113.634,96.9)
  Bottom Layer w0.3: v1(90.735,66.768) 90.75,66.753 90.75,64.1 v1(92.85,62)
DIG_6_tube3: R21_tube3.1 R22_tube3.1 U9.4 | length 63
  Top Layer w0.3: R21_tube3.1@82.734,96.2 v1(82.734,96.9) R22_tube3.1@82.734,97.6 ; v1(82.987,70.657) 83.025,70.62 83.025,68.925 U9.4@83.05,68.9
  Bottom Layer w0.127: v1(82.734,96.9) 82.734,95.333 84.497,93.57 84.497,93.512 86.21,91.8 100.7,91.8 103.916,88.584 103.916,80.085 101.635,77.805 88.621,77.805 82.987,72.171 v1(82.987,70.657)
DIG_6_tube4: R21_tube4.1 R22_tube4.1 U10.6 | length 48.1
  Top Layer w0.3: R21_tube4.1@58.034,96.2 v1(58.034,96.9) R22_tube4.1@58.034,97.6 ; v1(75.9,70.5) 75.95,70.45 U10.6@75.95,68.9
  Bottom Layer w0.127: v1(58.034,96.9) 58.034,95.333 59.797,93.57 59.797,93.512 61.51,91.8 76,91.8 79.216,88.584 79.216,75.672 75.9,72.356 v1(75.9,70.5)
DIG_6_tube5: R21_tube5.1 R22_tube5.1 U11.11 | length 71.5
  Top Layer w0.3: R21_tube5.1@27.134,96.2 v1(27.134,96.9) R22_tube5.1@27.134,97.6 ; v1(69,70.5) 69.026,70.474 69.026,66.74 v1(69.053,66.713) ; v1(71.45,62.1) 71.475,62.125 71.475,63.275 U11.11@71.5,63.3
  Bottom Layer w0.127: v1(27.134,96.9) 27.134,95.333 28.897,93.57 28.897,93.512 30.61,91.8 45.1,91.8 48.316,88.584 48.316,79.984 52.003,76.296 64.279,76.296 69,71.576 v1(69,70.5)
  Bottom Layer w0.3: v1(69.053,66.713) 69.053,64.497 v1(71.45,62.1)
DIG_6_tube6: R21_tube6.1 R22_tube6.1 U12.13 U13.1 | length 91.9
  Top Layer w0.3: R21_tube6.1@2.434,96.2 v1(2.434,96.9) R22_tube6.1@2.434,97.6 ; v1(61.878,66.792) 61.889,66.803 61.889,68.889 U13.1@61.9,68.9 v1(61.9,70.5) ; v1(64.05,62) 64.131,62 64.608,61.523 66.616,61.523 67,61.907 U12.13@67,63.3
  Bottom Layer w0.127: v1(2.434,96.9) 2.434,95.333 4.197,93.57 4.197,93.512 5.91,91.8 20.4,91.8 23.616,88.584 23.616,79.984 27.084,76.516 42.321,76.516 45.08,73.756 58.644,73.756 v1(61.9,70.5)
  Bottom Layer w0.3: v1(61.878,66.792) 61.9,66.769 61.9,64.15 v1(64.05,62)
DIG_7_tube1: R23_tube1.1 R24_tube1.1 U6.12 | length 96.8
  Top Layer w0.3: v1(97.2,67.1) v1(97.2,70.1) ; U6.12@101.05,63.3 101.064,63.287 101.064,62.113 v1(101.077,62.1) ; R23_tube1.1@150.467,88.5 v1(150.467,89.2) R24_tube1.1@150.467,89.9
  Bottom Layer w0.127: v1(97.2,70.1) 97.2,70.694 99.485,72.979 152.05,72.979 159.262,80.191 159.262,87.138 157.2,89.2 v1(150.467,89.2)
  Bottom Layer w0.3: v1(97.2,67.1) 97.227,67.073 97.227,64.407 100.111,61.523 100.589,61.523 100.927,61.861 100.927,61.869 101.077,62.019 v1(101.077,62.1)
DIG_7_tube2: R23_tube2.1 R24_tube2.1 U8.3 | length 68.5
  Top Layer w0.3: U8.3@89.5,68.9 89.525,68.925 89.525,70.044 89.6,70.119 v1(89.6,70.2) ; R23_tube2.1@125.767,88.5 v1(125.767,89.2) R24_tube2.1@125.767,89.9
  Bottom Layer w0.127: v1(89.6,70.2) 89.6,70.319 94.8,75.519 129.89,75.519 134.562,80.191 134.562,87.138 132.5,89.2 v1(125.767,89.2)
DIG_7_tube3: R23_tube3.1 R24_tube3.1 U9.5 | length 45.7
  Top Layer w0.3: v1(82.386,70.17) 82.386,68.913 U9.5@82.4,68.9 ; R23_tube3.1@94.867,88.5 v1(94.867,89.2) R24_tube3.1@94.867,89.9
  Bottom Layer w0.127: v1(82.386,70.17) 82.386,71.929 88.516,78.059 101.53,78.059 103.662,80.191 103.662,87.138 101.6,89.2 v1(94.867,89.2)
DIG_7_tube4: R23_tube4.1 R24_tube4.1 U10.10 | length 37
  Top Layer w0.3: R23_tube4.1@70.167,88.5 v1(70.167,89.2) R24_tube4.1@70.167,89.9 ; U10.10@76.6,63.3 76.625,63.325 76.625,64.348 v1(76.677,64.4)
  Bottom Layer w0.127: v1(70.167,89.2) 76.9,89.2 78.962,87.138 78.962,75.777 75.25,72.065 75.25,70.127 76.677,68.7 v1(76.677,64.4)
DIG_7_tube5: R23_tube5.1 R24_tube5.1 U11.12 | length 55.9
  Top Layer w0.3: R23_tube5.1@39.267,88.5 v1(39.267,89.2) R24_tube5.1@39.267,89.9 ; v1(68.35,66.9) v1(68.35,70) ; U11.12@72.15,63.3 72.163,63.287 72.163,62.094 v1(72.177,62.08)
  Bottom Layer w0.127: v1(39.267,89.2) 46,89.2 48.062,87.138 48.062,79.878 51.898,76.042 64.174,76.042 68.35,71.866 v1(68.35,70)
  Bottom Layer w0.3: v1(68.35,66.9) 68.35,64.384 71.211,61.523 71.689,61.523 72.177,62.011 v1(72.177,62.08)
DIG_7_tube6: R23_tube6.1 R24_tube6.1 U13.3 | length 61
  Top Layer w0.3: R23_tube6.1@14.567,88.5 v1(14.567,89.2) R24_tube6.1@14.567,89.9 ; U13.3@60.6,68.9 v1(60.6,70.5)
  Bottom Layer w0.127: v1(14.567,89.2) 21.3,89.2 23.362,87.138 23.362,79.878 26.978,76.262 42.216,76.262 44.975,73.502 57.598,73.502 v1(60.6,70.5)
DIG_8_tube1: R25_tube1.1 R26_tube1.1 U6.13 U7.1 | length 109.8
  Top Layer w0.3: v1(96.538,66.8) 96.575,66.837 96.575,68.875 U7.1@96.6,68.9 v1(96.6,70.7) ; v1(98.85,61.9) 98.931,61.9 99.308,61.523 101.316,61.523 101.7,61.907 U6.13@101.7,63.3 ; R25_tube1.1@138.367,88.6 v1(138.367,89.3) R26_tube1.1@138.367,90
  Bottom Layer w0.127: v1(96.6,70.7) 99.133,73.233 151.945,73.233 159.008,80.296 159.008,86.001 156.3,88.709 144.878,88.709 144.288,89.3 v1(138.367,89.3)
  Bottom Layer w0.3: v1(96.538,66.8) 96.53,66.792 96.53,64.22 v1(98.85,61.9)
DIG_8_tube2: R25_tube2.1 R26_tube2.1 U8.4 | length 80.3
  Top Layer w0.3: U8.4@88.85,68.9 88.875,68.925 88.875,70.675 v1(88.9,70.7) ; R25_tube2.1@113.667,88.6 v1(113.667,89.3) R26_tube2.1@113.667,90
  Bottom Layer w0.127: v1(88.9,70.7) 93.973,75.773 129.785,75.773 134.308,80.296 134.308,86.001 131.6,88.709 120.178,88.709 119.588,89.3 v1(113.667,89.3)
DIG_8_tube3: R25_tube3.1 R26_tube3.1 U9.6 | length 57.1
  Top Layer w0.3: U9.6@81.75,68.9 81.75,70.55 v1(81.8,70.6) ; R25_tube3.1@82.767,88.6 v1(82.767,89.3) R26_tube3.1@82.767,90
  Bottom Layer w0.127: v1(81.8,70.6) 81.8,71.702 88.41,78.313 101.425,78.313 103.408,80.296 103.408,86.001 100.7,88.709 89.278,88.709 88.688,89.3 v1(82.767,89.3)
DIG_8_tube4: R25_tube4.1 R26_tube4.1 U10.11 | length 51.3
  Top Layer w0.3: R25_tube4.1@58.067,88.6 v1(58.067,89.3) R26_tube4.1@58.067,90 ; v1(74.608,66.784) 74.65,66.827 v1@74.65,70.548 ; v1(77.25,62.1) U10.11@77.25,63.3
  Bottom Layer w0.127: v1(58.067,89.3) 63.988,89.3 64.578,88.709 76,88.709 78.708,86.001 78.708,76.067 74.651,72.01 v1@74.651,70.552
  Bottom Layer w0.3: v1(74.608,66.784) 74.608,64.742 74.693,64.657 v1(77.25,62.1)
  other v1: 74.651,70.549
DIG_8_tube5: R25_tube5.1 R26_tube5.1 U11.13 U12.1 | length 68.5
  Top Layer w0.3: R25_tube5.1@27.167,88.6 v1(27.167,89.3) R26_tube5.1@27.167,90 ; v1(67.565,66.729) 67.565,66.808 67.65,66.893 U12.1@67.65,68.9 67.675,68.925 67.675,70.475 v1(67.7,70.5) ; v1(69.839,62.079) 70.415,61.503 72.416,61.503 72.8,61.887 U11.13@72.8,63.3
  Bottom Layer w0.127: v1(27.167,89.3) 33.088,89.3 33.678,88.71 45.1,88.71 47.808,86.002 47.808,79.773 51.793,75.788 64.069,75.788 67.7,72.157 v1(67.7,70.5)
  Bottom Layer w0.3: v1(67.565,66.729) 67.565,64.353 v1(69.839,62.079)
DIG_8_tube6: R25_tube6.1 R26_tube6.1 U13.4 | length 71.9
  Top Layer w0.3: R25_tube6.1@2.467,88.6 v1(2.467,89.3) R26_tube6.1@2.467,90 ; v1(59.904,70.096) 59.927,70.073 59.927,68.923 U13.4@59.95,68.9
  Bottom Layer w0.127: v1(2.467,89.3) 8.388,89.3 8.978,88.71 20.4,88.71 23.108,86.002 23.108,79.773 26.873,76.008 42.11,76.008 44.87,73.248 57.245,73.248 59.904,70.589 v1(59.904,70.096)
DIG_9_tube1: R27_tube1.1 R28_tube1.1 U7.3 | length 79.6
  Top Layer w0.3: U7.3@95.3,68.9 v1(95.3,70.1) ; R27_tube1.1@150.5,81 v1(150.5,81.7) R28_tube1.1@150.5,82.4
  Bottom Layer w0.127: v1(95.3,70.1) 98.687,73.487 151.84,73.487 158.754,80.401 158.754,81.227 158.281,81.7 v1(150.5,81.7)
DIG_9_tube2: R27_tube2.1 R28_tube2.1 U8.5 | length 62.3
  Top Layer w0.3: U8.5@88.2,68.9 v1(88.2,70.1) ; R27_tube2.1@125.8,81 v1(125.8,81.7) R28_tube2.1@125.8,82.4
  Bottom Layer w0.127: v1(88.2,70.1) 88.2,70.694 93.533,76.027 129.68,76.027 134.054,80.401 134.054,81.227 133.581,81.7 v1(125.8,81.7)
DIG_9_tube3: R27_tube3.1 R28_tube3.1 U9.10 | length 45.1
  Top Layer w0.3: U9.10@82.4,63.3 82.425,63.325 82.425,64.348 v1(82.477,64.4) ; R27_tube3.1@94.9,81 v1(94.9,81.7) R28_tube3.1@94.9,82.4
  Bottom Layer w0.127: v1(82.477,64.4) 82.477,68.873 81.15,70.2 81.15,71.411 88.305,78.567 101.32,78.567 103.154,80.401 103.154,81.227 102.681,81.7 v1(94.9,81.7)
DIG_9_tube4: R27_tube4.1 R28_tube4.1 U10.12 | length 35.1
  Top Layer w0.3: R27_tube4.1@70.2,81 v1(70.2,81.7) R28_tube4.1@70.2,82.4 ; v1(74.009,67.378) 74.05,67.419 v1(74.05,70.1) ; U10.12@77.9,63.3 77.925,63.275 77.925,62.152 v1(77.977,62.1)
  Bottom Layer w0.127: v1(70.2,81.7) 77.981,81.7 78.454,81.227 78.454,76.172 74.05,71.768 v1(74.05,70.1)
  Bottom Layer w0.3: v1(74.009,67.378) 74.031,67.356 74.031,66.485 74.116,66.4 74.116,64.418 77.011,61.523 77.489,61.523 77.827,61.861 77.827,61.869 77.977,62.019 v1(77.977,62.1)
DIG_9_tube5: R27_tube5.1 R28_tube5.1 U12.3 | length 37.2
  Top Layer w0.3: R27_tube5.1@39.3,81 v1(39.3,81.7) R28_tube5.1@39.3,82.4 ; v1(66.3,70) 66.325,69.975 66.325,68.925 U12.3@66.35,68.9
  Bottom Layer w0.127: v1(39.3,81.7) 47.081,81.7 47.554,81.227 47.554,79.668 51.688,75.534 63.964,75.534 66.3,73.198 v1(66.3,70)
DIG_9_tube6: R27_tube6.1 R28_tube6.1 U13.5 | length 53.3
  Top Layer w0.3: R27_tube6.1@14.6,81 v1(14.6,81.7) R28_tube6.1@14.6,82.4 ; U13.5@59.3,68.9 v1(59.3,70.5)
  Bottom Layer w0.127: v1(14.6,81.7) 22.381,81.7 22.854,81.227 22.854,79.668 26.768,75.754 42.005,75.754 44.765,72.994 56.806,72.994 v1(59.3,70.5)
DIGVDD: C49.1 U15.33 | length 1.7
  Top Layer w0.127: U15.33@23.248,14.723 23.779,14.723 24.381,15.325 24.497,15.325 C49.1@24.67,15.498
DISPLAY_SPI_A0: DS1.38 pad.13@34.975,44.883 U14.45 | length 49.2
  Top Layer w0.3: U14.45@27.9,23.21 27.9,36.676 v1(27.947,36.723) ; v1(34.072,43.828) 46.344,56.1 v1(52.725,56.1)
  Bottom Layer w0.3: v1(27.947,36.723) 27.947,37.703 v1(34.072,43.828) ; v1(52.725,56.1) 53.35,56.725 53.35,57.007 54.081,57.737 DS1.38@54.124,57.737
DISPLAY_SPI_CLK: DS1.37 pad.13@34.4,45.4 U14.44 | length 52.5
  Top Layer w0.3: v1(27.221,36.747) 27.221,36.666 27.369,36.518 27.369,36.405 27.399,36.374 U14.44@27.399,23.21 ; v1(33.558,44.342) 45.916,56.7 55.627,56.7 DS1.37@56.664,57.737
  Bottom Layer w0.3: v1(27.221,36.747) 27.221,38.005 v1(33.558,44.342)
DISPLAY_SPI_MOSI: DS1.36 pad.13@35.461,44.358 U14.46 | length 53.3
  Top Layer w0.3: U14.46@28.399,23.21 28.399,36.36 28.524,36.484 28.524,36.515 28.674,36.665 v1(28.674,36.746) ; v1(34.586,43.314) 46.672,55.4 56.867,55.4 DS1.36@59.204,57.737
  Bottom Layer w0.3: v1(28.674,36.746) 28.674,37.402 v1(34.586,43.314)
ENA_1_5V: R30_tube1.2 R32_tube1.2 U5.21 | length 145.5
  Top Layer w0.127: v1(51.1,70.1) 51.11,70.09 U5.21@51.11,68.981 ; v1(54.9,70.158) 57.964,70.158 61.991,74.185 133.223,74.185 137.5,78.461 137.5,112.067 138.435,113.001 148.374,113.001 v1(148.973,113.6)
  Top Layer w0.3: R32_tube1.2@152.243,119.078 v1(152.943,119.078) R30_tube1.2@153.643,119.078
  Bottom Layer w0.127: v1(51.1,70.1) 51.187,70.013 54.627,70.013 54.772,70.158 v1(54.9,70.158) ; v1(148.973,113.6) 148.973,115.44 151.697,118.165 152.03,118.165 v1(152.943,119.078)
ENA_2_5V: R30_tube2.2 R32_tube2.2 U5.20 | length 120.2
  Top Layer w0.127: v1(51.705,70.503) 51.732,70.476 51.732,69.009 U5.20@51.76,68.981 ; v1(54.9,70.885) 58.332,70.885 62.335,74.888 108.888,74.888 112.8,78.8 112.8,112.067 113.734,113.001 123.674,113.001 v1(124.273,113.6)
  Top Layer w0.3: R32_tube2.2@127.543,119.078 v1(128.243,119.078) R30_tube2.2@128.943,119.078
  Bottom Layer w0.127: v1(51.705,70.503) 51.795,70.413 52.194,70.413 52.197,70.41 54.425,70.41 v1(54.9,70.885) ; v1(124.273,113.6) 124.273,115.44 126.997,118.165 127.33,118.165 v1(128.243,119.078)
ENA_3_5V: R30_tube3.2 R32_tube3.2 U5.19 | length 89.1
  Top Layer w0.127: v1(52.4,70.9) 52.405,70.895 52.405,68.986 U5.19@52.41,68.981 ; v1(54.9,71.612) 58.7,71.612 62.23,75.142 78.58,75.142 81.9,78.461 81.9,112.067 82.835,113.001 92.774,113.001 v1(93.373,113.6)
  Top Layer w0.3: R32_tube3.2@96.643,119.078 v1(97.343,119.078) R30_tube3.2@98.043,119.078
  Bottom Layer w0.127: v1(52.4,70.9) 52.487,70.813 54.101,70.813 v1(54.9,71.612) ; v1(93.373,113.6) 93.373,115.44 96.097,118.165 96.43,118.165 v1(97.343,119.078)
ENA_4_5V: R30_tube4.2 R32_tube4.2 U5.18 | length 66.6
  Top Layer w0.127: v1(53.005,71.369) 53.032,71.341 53.032,69.009 U5.18@53.06,68.981 ; v1(55.4,72.2) 57.2,74 57.2,112.067 58.134,113.001 68.074,113.001 v1(68.673,113.6)
  Top Layer w0.3: R32_tube4.2@71.943,119.078 v1(72.643,119.078) R30_tube4.2@73.343,119.078
  Bottom Layer w0.127: v1(53.005,71.369) 53.787,71.369 54.618,72.2 v1(55.4,72.2) ; v1(68.673,113.6) 68.673,115.44 71.397,118.165 71.73,118.165 v1(72.643,119.078)
ENA_5_5V: R30_tube5.2 R32_tube5.2 U5.17 | length 87.2
  Top Layer w0.127: v1(37.773,113.6) 37.174,113.001 27.234,113.001 26.3,112.067 26.3,78.641 27.796,77.144 48.255,77.144 53.705,71.695 53.705,68.986 U5.17@53.71,68.981
  Top Layer w0.3: R32_tube5.2@41.043,119.078 v1(41.743,119.078) R30_tube5.2@42.443,119.078
  Bottom Layer w0.127: v1(37.773,113.6) 37.773,115.44 40.497,118.165 40.83,118.165 v1(41.743,119.078)
ENA_6_5V: R30_tube6.2 R32_tube6.2 U5.16 | length 113
  Top Layer w0.127: v1(13.073,113.6) 12.474,113.001 2.535,113.001 1.6,112.067 1.6,78.641 3.35,76.89 47.81,76.89 v1(52.5,72.2) ; v1(53.9,72.2) 53.9,72.3 v1@54,72.4 ; v1@54.054,72.354 54.332,72.076 54.332,69.008 U5.16@54.36,68.981
  Top Layer w0.3: R32_tube6.2@16.343,119.078 v1(17.043,119.078) R30_tube6.2@17.743,119.078
  Bottom Layer w0.127: v1(13.073,113.6) 13.073,115.44 15.797,118.165 16.13,118.165 v1(17.043,119.078) ; v1(52.5,72.2) v1(53.9,72.2)